# Altium PCB PCB1.PcbDoc
Units mil, origin at the board's own origin, x right, y up, seen from the top; angles counter-clockwise.
Board outline 6000 x 4000 mil, 2 copper layers (Top Layer, Bottom Layer); 22 components, 9 nets, 55 pads, 1 vias.
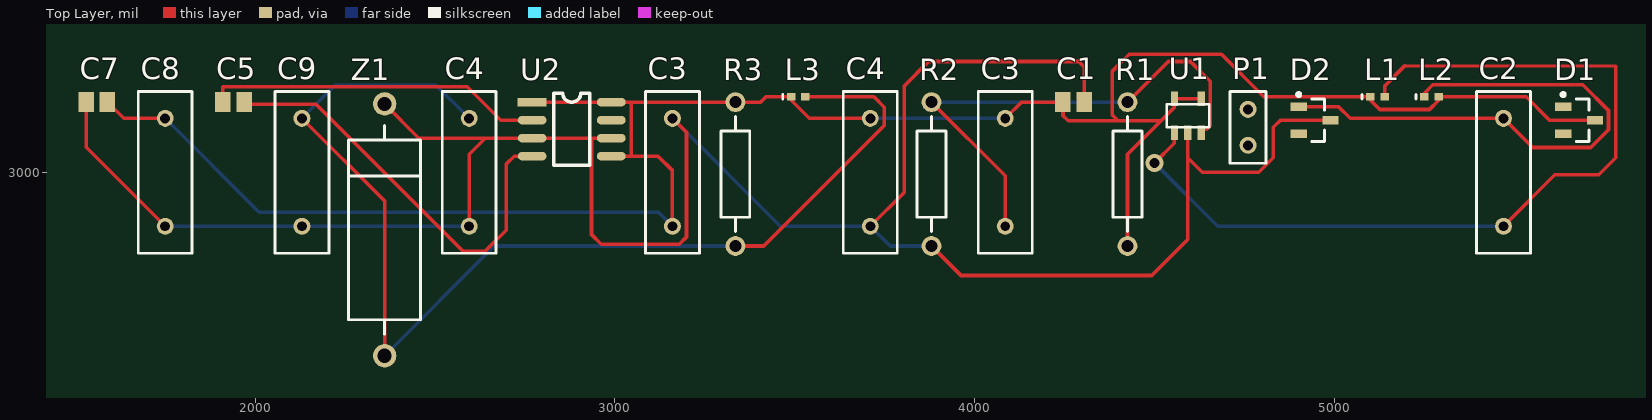
[diagram p0: Top Layer view]
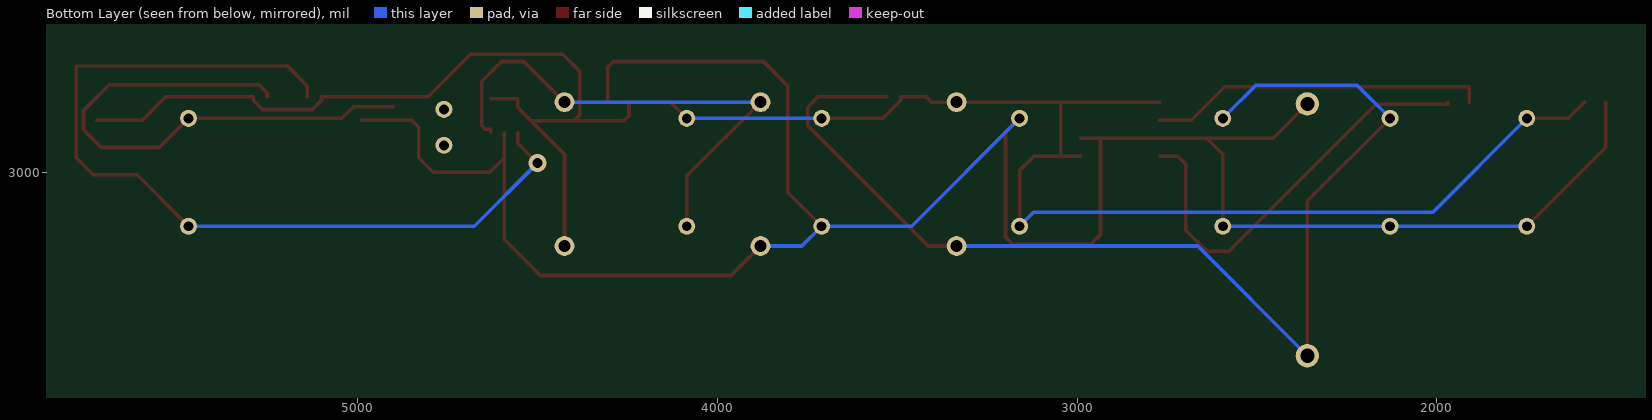
[diagram p1: Bottom Layer view, seen from below]

## Layer stack, top to bottom
Top Solder: solder mask 0.4, Solder Resist, Dk 3.5
Top Layer: signal copper 1.4
Dielectric 1: dielectric 12.6, FR-4, Dk 4.8
Bottom Layer: signal copper 1.4
Bottom Solder: solder mask 0.4, Solder Resist, Dk 3.5

## Board outline
1000,1000 7000,1000 7000,5000 1000,5000

## Design rules (kind name [scope] priority, off if disabled: settings)
Clearance [All] p1: gap=10 ignorepadtopadclearanceinfootprint=FALSE except(0: Arc-Hole Track-Hole SMDPad-Hole THPad-Hole Via-Hole Fill-Hole Poly-Hole Region-Hole Text-Hole)
PolygonConnect [All] p1: connectstyle=Relief reliefconductorwidth=10 reliefentries=4 polygonreliefangle="90 Angle" airgapwidth=10
RoomDefinition Schematic1 [InComponentClass('Schematic1')] p1: confinementstyle=ConfineIn formatcopy=TRUE lockcomponents=FALSE outline 1495,2445 5765,2445 5765,3335 1495,3335
RoutingVias [All] p1: holewidth=28 width=50 viastyle="Through Hole" minholewidth=28 minwidth=50 maxholewidth=28 maxwidth=50
SolderMaskExpansion [All] p1: expansion=4
Width [All] p1: maxlimit=10 minlimit=10 preferedwidth=10
30 further rules are at their usual default settings.

## Classes and differential pairs
component class Schematic1: C1 C2 C3 C4 C5 C7 C8 C9 D1 D2 L1 L2 L3 P1 R1 R2 R3 U1 U2 Z1

## Components (designator, comment, footprint, x,y, rotation, side; value= is the part's Value field where it differs from the comment)
C1 "Cap Pol3" C0805 4275,3195 r0 top value=22uF
C2 "Cap" RAD-0.3 5470,3000 r90 top value=1uF
C3 "Cap" RAD-0.3 4085,3000 r90 top value=330pF
C3 "Cap" RAD-0.3 3160,3000 r90 top value=1uF
C4 "Cap" RAD-0.3 3710,3000 r90 top value=10u/25V
C4 "Cap" RAD-0.3 2595,3000 r90 top value=1uF
C5 "Cap Pol3" C0805 1940,3195 r0 top value=10u
C7 "Cap Pol3" C0805 1560,3195 r0 top value=10u/16V
C8 "Cap" RAD-0.3 1750,3000 r90 top value=0.1u
C9 "Cap" RAD-0.3 2130,3000 r90 top value=100uF
D1 "MBR0520L" SOT-23_N 5680,3145 r0 top
D2 "MBR0520L" SOT-23_N 4945,3145 r0 top
L1 "Inductor" 0402-A 5120,3210 r0 top value=10uH
L2 "Inductor" 0402-A 5270,3210 r0 top value=10uH
L3 "Inductor" 0402-A 3510,3210 r0 top value=100uH
P1 "PWR" RAD-0.1 4760,3125 r90 top
R1 "Res2" AXIAL-0.4 4425,2995 r90 top value=110K
R2 "Res2" AXIAL-0.4 3880,2995 r90 top value=10K
R3 "Res2" AXIAL-0.4 3335,2995 r90 top value=510
U1 "LT1611CS5" SOT23-5 4555,3110 r0 top
U2 "MAX660M(opt.)" SO-8 2770,3195 r0 top
Z1 "5.6V" DIODE-0.7 2360,2840 r90 top

## Footprints (in the part's own frame and the unit in brackets; to place one, negate y for a bottom-side part, rotate by r counter-clockwise, add the part's x,y. Pads: shape width x height; smd on the part's side, far side on the other; paste and mask are expansions set on the pad)
0402-A [mm] "Chip Inductor, Body 1.0x0.5mm, IPC High Density"
  rect 0.6x0.5 smd: 1(-0.5,0) 2(0.5,0)
  silkscreen extent -1.1,-0.15 -1.1,0.15, body extent -0.55,-0.3 0.55,0.3, height 0.55
AXIAL-0.4 [mm] "Axial Device, Thru-Hole; 2 Leads; 0.4 in Pin Spacing"
  round 1.4 hole 0.85: 1(-5.08,0) 2(5.08,0)
  silkscreen extent -4.06,-1.02 4.06,1.02
C0805 [mm] "Chip Capacitor, Body 2.0x1.3mm, IPC High Density"
  rect 1.1x1.4 smd: 1(-0.75,0) 2(0.75,0)
  body extent -1.1,-0.72 1.1,0.72, height 1.4
DIODE-0.7 [mm] "Diode, Thru-Hole; 2 Leads; 0.7 in Pin Spacing"
  round 1.65 hole 1: 1(-8.89,0) 2(8.89,0)
  silkscreen extent -7.37,-2.54 7.37,2.54
RAD-0.1 [mm] "Radial Cap, Thru-Hole; 2 Leads; 0.1 in Pin Spacing"
  round 1.2 hole 0.7: 1(-1.27,0) 2(1.27,0)
  silkscreen extent -2.54,-1.27 2.54,1.27
RAD-0.3 [mm] "Radial Cap, Thru-Hole; 2 Leads; 0.3 in Pin Spacing"
  round 1.2 hole 0.7: 1(-3.81,0) 2(3.81,0)
  silkscreen extent -5.71,-1.91 5.71,1.91
SO-8 [mil]
  rect 80x24 smd: 1(0,0)
  oval 80x24 smd: 2(0,-50) 3(0,-100) 4(0,-150) 5(220,-150) 6(220,-100) 7(220,-50) 8(220,0)
  silkscreen extent 60,-175 160,25
SOT23-5 [mm]
  rect 0.5x1 smd: 1(0,0) 2(0.95,0) 3(1.9,0) 4(1.9,2.4) 5(0,2.4)
  silkscreen extent -0.55,0.4 2.45,2, body extent -0.5,-0.2 2.4,2.6, height 1.09
SOT-23_N [mm] "SOT23, 3-Leads, Body 2.9x1.3mm, Pitch 0.95mm, Lead Span 2.5mm, IPC Medium Density"
  rect 1.15x0.6 smd: 1(-1.125,0.95) 2(-1.125,-0.95) 3(1.125,0)
  silkscreen extent -1.25,-1.5 0.7,1.92, body extent -0.7,-1.5 0.7,1.5, height 1.1

## Part data
C1 C5 C7: "Polarized Capacitor (Surface Mount)", LatestRevisionDate=29-May-2009, LatestRevisionNote="IPC-7351 Footprint Added.", PackageDescription="Chip Capacitor", PackageReference=C0805, Published=8-Jun-2000, Publisher="Altium Limited"
C2 C3 C3 C4 C4 C8 C9: "Capacitor", LatestRevisionDate=17-Jul-2002, LatestRevisionNote="Re-released for DXP Platform.", PackageDescription="Radial Cap, Thru-Hole; 2 Leads; 0.3 in Pin Spacing", PackageReference=RAD-0.3, Published=8-Jun-2000, Publisher="Altium Limited"
D1 D2: library part "Diode BAT17", "Silicon RF Schottky Diode for Mixer Applications in the VHF/UHF Range", ComponentLink1Description="Manufacturer Link", ComponentLink1URL=http://www.infineon.com/, ComponentLink2Description=Datasheet, ComponentLink2URL=http://www.infineon.com/upload/Document/cmc_upload/documents/009/363/bat17series.pdf, DatasheetVersion=Oct-1999, LatestRevisionDate=29-May-2009, LatestRevisionNote="IPC-7351 Footprint Added.", Note="Pin 2 is not connected and not drawn.", PackageDescription="3-Pin SOT-23 Package 0.95 mm Pitch, 2.5 mm Lead Span", PackageReference=SOT-23, PackageVersion=Sep-2001, Published=21-Mar-2003, Publisher="Altium Limited"
R1 R2 R3: "Resistor", LatestRevisionDate=17-Jul-2002, LatestRevisionNote="Re-released for DXP Platform.", PackageDescription="Axial Device, Thru-Hole; 2 Leads; 0.4 in Pin Spacing", PackageReference=AXIAL-0.4, Published=8-Jun-2000, Publisher="Altium Limited"
Z1: library part "D Zener", "Zener Diode", LatestRevisionDate=17-Jul-2002, LatestRevisionNote="Re-released for DXP Platform.", PackageDescription="Diode, Thru-Hole; 2 Leads; 0.7 in Pin Spacing", PackageReference=DIODE-0.7, Published=8-Jun-2000, Publisher="Altium Limited"
L1 L2 L3: Code_IEC=1005, Code_JEITA=0402, LatestRevisionDate=29-May-2009, LatestRevisionNote="IPC-7351 Footprint Added.", PackageDescription="Chip Inductor", PackageReference=0402-A, Published=8-Jun-2000, Publisher="Altium Limited"

## Via types
v1: diameter 50, hole 28, Top Layer to Bottom Layer, 1 vias

## Nets (pads, with @x,y where several pads share a name; then routed paths per layer and width w, separated by ;. In a path a pad name is that pad's centre, name@x,y a point inside that pad or via, vN(x,y) a via of type N, cw(c..) or ccw(c..) an arc to the next point about the centre after c; other vN are vias at no path point)
-5V: C1.1 C3.1@3160,2850 C3.2@4085,3150 C4.2@3710,3150 C7.2 C8.2 D1.3 L1.1 L2.2 L3.1 R1.1 R3.2 U1.4 U1.5 U2.1 U2.5 U2.8 | length 6213.3
  Top Layer w10: C7.2 1634.53,3150 C8.2 ; U2.1 U2.8 3045,3195 ; U2.5 3045,3045 ; C3.1@3160,2850 3160,3005 3120,3045 3045,3045 ; C4.2@3710,3150 3540.32,3150 3490.32,3200 L3.1 3420,3210 3405,3195 R3.2 3045,3195 ; C3.2@4085,3150 4130,3195 C1.1 4245.47,3157.53 4260,3143 4399,3143 ; R1.1 4425,3050 4518,3143 ; U1.4 U1.5 4555,3180 4518,3143 ; D1.3 5598,3145 5533,3210 L2.2 5289.69,3200 5264.14,3174.45 5125.87,3174.45 5100.32,3200 L1.1 4804,3210 4686,3328 4430,3328 4382,3280 4382,3160 4399,3143 ; 3045,3045 3045,3195 ; 4399,3143 4518,3143
  Bottom Layer w10: C8.2 2011,2889 3121,2889 C3.1@3160,2850 ; C4.2@3710,3150 C3.2@4085,3150
GND: C1.2 C3.2@3160,3150 C4.1 C7.1 C8.1 C9.1 D2.3 R2.1 U1.2 U2.3 U2.6 Z1.2 | length 6648
  Top Layer w10: C7.1 1530.47,3069.53 C8.1 ; Z1.2 2455,3095 2640,3095 ; C4.1@2595,2850 2595,3050 2640,3095 ; U2.6 2935,3095 ; C3.2@3160,3150 3199,3111 3199,2820 3179,2800 2962,2800 2935,2827 2935,3095 ; C4.1@3710,2850 3804,2944 3804,3240 3872,3308 4289,3308 4304.53,3292.47 C1.2 ; R2.1 3962,2713 4492,2713 4592.4,2813.4 4592.4,3040 ; U1.2 4592.4,3040 ; D2.3 4850,3145 4830,3125 4830,3040 4790,3000 4632.4,3000 4592.4,3040 ; 2640,3095 U2.3 2935,3095
  Bottom Layer w10: C8.1 C9.1 C4.1@2595,2850 ; C3.2@3160,3150 3460,2850 3710,2850 3765,2795 R2.1
NetC2_1: C2.1 L1.2 U1.1 | length 2491.1
  Top Layer w10: v1(4500,3026) 4555,3081 U1.1 ; L1.2 5139.69,3240 5196.37,3296.69 5781.93,3295.07 5781.93,3040 5734.79,2992.86 5612.86,2992.86 C2.1
  Bottom Layer w10: v1(4500,3026) 4676,2850 C2.1
NetC2_2: C2.2 D2.1 L2.1 | length 1543.2
  Top Layer w10: D2.1 5011.6,3182.4 5044,3150 C2.2 5551,3069 5712.93,3069 5761.93,3118 5761.93,3171.81 5690.43,3243.32 5273.63,3243.32 5250.32,3220 L2.1
NetC3_1: C3.1@4085,2850 R1.2 R2.2 U1.3 | length 1436.8
  Top Layer w10: R2.2 4085,2990 C3.1@4085,2850 ; R1.2 4538,3308 4600,3308 4655,3253 4655,3130 4645,3120 4629.8,3120 U1.3
  Bottom Layer w10: R2.2 R1.2
NetC4_2: C4.2@2595,3150 C9.2 L3.2 R3.1 Z1.1 | length 3232.9
  Top Layer w10: C9.2 2360,2920 Z1.1 ; R3.1 3414,2795 3749,3130 3749,3181 3720,3210 L3.2
  Bottom Layer w10: C9.2 2222,3242 2503,3242 C4.2@2595,3150 ; Z1.1 2665,2795 R3.1
NetC5_1: C5.1 U2.2 | length 941
  Top Layer w10: C5.1 1910.47,3238 2590,3238 2683,3145 U2.2
NetC5_2: C5.2 U2.4 | length 1192.6
  Top Layer w10: C5.2 1969.53,3189 2169,3189 2577,2781 2640,2781 2698,2839 2698,3023 2720,3045 U2.4
NetD1_1: D1.1
pads on no net: D1.2 D2.2 P1.1 P1.2 U2.7